# EAGLE board MCB1 (EAGLE 8.0.0)

Size 101.6 x 101.6 mm. Coordinates in mm from the lower left corner, seen from the top.
Outline: circle at 50.8,50.8 radius 50.8
Copper layers (1*16): Top 0.035mm / dielectric 1.5mm / Bottom 0.035mm
Design rules "default": minimum track width 10mil, minimum drill 24mil, track to track 8mil, track to pad 8mil, pad to pad 8mil, via to via 8mil, smd to smd 8mil, copper to edge 40mil, drill to drill 8mil, minimum pad ring 10mil, minimum via ring 8mil, stop-mask expansion 4mil, vias tented up to drill 0mil, thermal gap 10mil

## Footprints (pad centres in the part's own frame; a part is rotated, then mirrored left to right if it is on the bottom)
KK254_VERT_2PIN = drill 1.2 octagon: P$1 1.27,0; P$2 -1.27,0
SML1206 = smd 1.5 x 1.5: A 1.75,0; C -1.75,0
C0805 = smd 1.3 x 1.5: 1 -0.95,0; 2 0.95,0
SOD123 = smd 1.4 x 1.4: A 1.9,0; C -1.9,0
FUSE_5MM = drill 2.54 pad 3.556: 1 0,-10; 2 0,-4.158; 3 0,4.158; 4 0,10
SO16 = smd 0.66 x 2.032: 1 -4.445,-3.073; 2 -3.175,-3.073; 3 -1.905,-3.073; 4 -0.635,-3.073; 5 0.635,-3.073; 6 1.905,-3.073; 7 3.175,-3.073; 8 4.445,-3.073; 9 4.445,3.073; 10 3.175,3.073; 11 1.905,3.073; 12 0.635,3.073; 13 -0.635,3.073; 14 -1.905,3.073; 15 -3.175,3.073; 16 -4.445,3.073
CHIPLED_0805 = smd 1.2 x 1.2: A 0,-1.05; C 0,1.05
CHIPLED_1206 = smd 1.5 x 1.5: A 0,-1.75; C 0,1.75
R0603 = smd 1 x 1.1: 1 -0.85,0; 2 0.85,0
R0805 = smd 1.3 x 1.5: 1 -0.95,0; 2 0.95,0
TSSOP-28_4MM = smd 1 x 0.3: 1 -3.2,4.225; 2 -3.2,3.575; 3 -3.2,2.925; 4 -3.2,2.275; 5 -3.2,1.625; 6 -3.2,0.975; 7 -3.2,0.325; 8 -3.2,-0.325; 9 -3.2,-0.975; 10 -3.2,-1.625; 11 -3.2,-2.275; 12 -3.2,-2.925; 13 -3.2,-3.575; 14 -3.2,-4.225; 15 3.2,-4.225; 16 3.2,-3.575; 17 3.2,-2.925; 18 3.2,-2.275; 19 3.2,-1.625; 20 3.2,-0.975; 21 3.2,-0.325; 22 3.2,0.325; 23 3.2,0.975; 24 3.2,1.625; 25 3.2,2.275; 26 3.2,2.925; 27 3.2,3.575; 28 3.2,4.225
LTC2497-UHF = smd 0.25 x 0.7: ADCINN -0.25,2.4; ADCINP 0.25,2.4; CH0 0.75,-2.4; CH1 1.25,-2.4; CH2 1.75,-2.4; CH3 2.25,-2.4; CH4 2.75,-2.4; CH12 2.75,2.4; CH13 2.25,2.4; CH14 1.75,2.4; CH15 1.25,2.4; COM 0.25,-2.4; GND0 -2.75,-2.4; GND1 -1.25,-2.4; GND2 -0.25,-2.4; GND3 -2.75,2.4; MUXOUTN -0.75,2.4; MUXOUTP 0.75,2.4; NC -0.75,-2.4; REF+ -1.75,2.4; REF- -2.25,2.4; SCL -2.25,-2.4; SDA -1.75,-2.4; VCC -1.25,2.4 | smd 0.7 x 0.25: CA0 -3.4,-0.5; CA1 -3.4,-1; CA2 -3.4,-1.5; CH5 3.4,-1.5; CH6 3.4,-1; CH7 3.4,-0.5; CH8 3.4,0; CH9 3.4,0.5; CH10 3.4,1; CH11 3.4,1.5; F0 -3.4,0; GND4 -3.4,0.5; GND5 -3.4,1; GND6 -3.4,1.5
ACS713-SOIC = smd 0.65 x 1.75: P$1 -1.905,-2.8; P$2 -0.635,-2.8; P$3 0.635,-2.8; P$4 1.905,-2.8; P$5 1.905,2.8; P$6 0.635,2.8; P$7 -0.635,2.8; P$8 -1.905,2.8
SUPERSABRE_3CIRCUIT = drill 5.15: P$1 0,0; P$3 -7.49,0 | drill 5.15 square: P$2 7.49,0 | hole 3: 12.29,-1.805; -12.29,-2.345
ULTRAFIT_2PIN = drill 1.02: P$1 -1.75,0 | drill 1.02 square: P$2 1.75,0 | hole 2.3: 4.25,-0.625; -4.25,-0.625
PW_R-PDSO-G24 = smd 0.4 x 1.2: 1 -3.575,-2.9; 2 -2.925,-2.9; 3 -2.275,-2.9; 4 -1.625,-2.9; 5 -0.975,-2.9; 6 -0.325,-2.9; 7 0.325,-2.9; 8 0.975,-2.9; 9 1.625,-2.9; 10 2.275,-2.9; 11 2.925,-2.9; 12 3.575,-2.9; 13 3.575,2.9; 14 2.925,2.9; 15 2.275,2.9; 16 1.625,2.9; 17 0.975,2.9; 18 0.325,2.9; 19 -0.325,2.9; 20 -0.975,2.9; 21 -1.625,2.9; 22 -2.275,2.9; 23 -2.925,2.9; 24 -3.575,2.9
SO8 = smd 0.6 x 2.2: 1 -1.905,-2.6; 2 -0.635,-2.6; 3 0.635,-2.6; 4 1.905,-2.6; 5 1.905,2.6; 6 0.635,2.6; 7 -0.635,2.6; 8 -1.905,2.6
MS5837-30BA = smd 1.3 x 1.3: 1 -1,1; 2 -1,-1; 3 1,-1; 4 1,1
X-SERIES = drill 1.778 square: P1 10.363,1.994; P2 10.363,-1.994
87438-04 = smd 7 x 0.85: 1 0,2.25; 2 0,0.75; 3 0,-0.75; 4 0,-2.25

## Placement (x,y rotation side)
2PIN_1  [KK254_VERT_2PIN]  -50.8,27.94 0 top  (outside the outline)
2PIN_2  [KK254_VERT_2PIN]  -57.15,-31.75 0 top  (outside the outline)
2PIN_3  [KK254_VERT_2PIN]  -68.58,27.94 0 top  (outside the outline)
2PIN_4  [KK254_VERT_2PIN]  19.05,40.64 0 top
2PIN_6  [KK254_VERT_2PIN]  -26.67,52.07 0 top  (outside the outline)
2PIN_7  [KK254_VERT_2PIN]  -35.56,52.07 0 top  (outside the outline)
2PIN_8  [KK254_VERT_2PIN]  19.05,49.53 0 top
2PIN_9  [KK254_VERT_2PIN]  -53.34,52.07 0 top  (outside the outline)
2PIN_10  [KK254_VERT_2PIN]  -33.02,27.94 0 top  (outside the outline)
2PIN_11  [KK254_VERT_2PIN]  -41.91,27.94 0 top  (outside the outline)
5V_PWR  [SML1206]  67.31,-30.48 0 top  (outside the outline)
C1  47nF  [C0805]  -47.75,-39.37 180 top  (outside the outline)
C2  0.1uF  [C0805]  -43.18,-39.37 0 top  (outside the outline)
C3  0.1uF  [C0805]  -58.42,64.77 0 top  (outside the outline)
C4  47nF  [C0805]  -49.53,69.85 0 top  (outside the outline)
C5  0.1uF  [C0805]  -64.77,60.96 0 top  (outside the outline)
C6  47nF  [C0805]  -55.88,69.85 0 top  (outside the outline)
C7  0.1uF  [C0805]  -71.12,60.96 0 top  (outside the outline)
C8  47nF  [C0805]  -63.5,68.58 0 top  (outside the outline)
C11  47nF  [C0805]  -68.58,69.85 0 top  (outside the outline)
C12  0.1uF  [C0805]  -17.78,69.85 0 top  (outside the outline)
C13  0.1uF  [C0805]  -24.13,69.85 0 top  (outside the outline)
C14  47nF  [C0805]  -74.93,69.85 0 top  (outside the outline)
C15  0.1uF  [C0805]  -30.48,69.85 0 top  (outside the outline)
C16  47nF  [C0805]  -16.51,76.2 0 top  (outside the outline)
C17  0.1uF  [C0805]  -36.83,69.85 0 top  (outside the outline)
C18  47nF  [C0805]  -22.86,76.2 0 top  (outside the outline)
D1  [SOD123]  77.47,-30.48 0 top  (outside the outline)
D2  [SOD123]  86.36,-30.48 0 top  (outside the outline)
D3  [SOD123]  95.25,-30.48 0 top  (outside the outline)
D4  [SOD123]  104.14,-30.48 0 top  (outside the outline)
D5  [SOD123]  113.03,-30.48 0 top  (outside the outline)
D6  [SOD123]  121.92,-30.48 0 top  (outside the outline)
D7  [SOD123]  8.89,-35.56 0 top  (outside the outline)
D8  [SOD123]  17.78,-35.56 0 top  (outside the outline)
D9  [SOD123]  26.67,-35.56 0 top  (outside the outline)
D10  [SOD123]  35.56,-35.56 0 top  (outside the outline)
D11  [SOD123]  44.45,-35.56 0 top  (outside the outline)
D12  [SOD123]  53.34,-35.56 0 top  (outside the outline)
F1  FUSEX20MM  [FUSE_5MM]  -83.82,-26.67 0 top  (outside the outline)
F2  FUSEX20MM  [FUSE_5MM]  -50.8,-24.64 90 top  (outside the outline)
F3  FUSEX20MM  [FUSE_5MM]  -31.75,12.7 0 top  (outside the outline)
F4  FUSEX20MM  [FUSE_5MM]  -39.37,12.7 0 top  (outside the outline)
F5  FUSEX20MM  [FUSE_5MM]  -46.99,12.7 0 top  (outside the outline)
F6  FUSEX20MM  [FUSE_5MM]  -54.61,12.7 0 top  (outside the outline)
F7  FUSEX20MM  [FUSE_5MM]  -62.23,12.7 0 top  (outside the outline)
F8  FUSEX20MM  [FUSE_5MM]  -69.85,12.7 0 top  (outside the outline)
F9  FUSEX20MM  [FUSE_5MM]  50.8,96.52 270 top
IC1  ULN2001AD  [SO16]  127,11.43 0 top  (outside the outline)
IC2  ULN2001AD  [SO16]  -12.7,-53.34 0 top  (outside the outline)
LED1  [CHIPLED_0805]  -67.31,74.93 0 top  (outside the outline)
LED2  [CHIPLED_0805]  -72.39,74.93 0 top  (outside the outline)
LED3  [CHIPLED_0805]  -13.97,81.28 0 top  (outside the outline)
LED4  [CHIPLED_0805]  -19.05,81.28 0 top  (outside the outline)
LED5  [CHIPLED_0805]  -24.13,81.28 0 top  (outside the outline)
LED6  [CHIPLED_0805]  -29.21,81.28 0 top  (outside the outline)
LED7  [CHIPLED_0805]  -34.29,81.28 0 top  (outside the outline)
LED8  [CHIPLED_0805]  -39.37,81.28 0 top  (outside the outline)
LED9  [CHIPLED_1206]  124.46,-16.51 0 top  (outside the outline)
LED10  [CHIPLED_1206]  54.61,-17.78 0 top  (outside the outline)
LED11  [CHIPLED_1206]  60.96,-17.78 0 top  (outside the outline)
LED12  [CHIPLED_1206]  67.31,-17.78 0 top  (outside the outline)
LED13  [CHIPLED_1206]  73.66,-17.78 0 top  (outside the outline)
LED14  [CHIPLED_1206]  80.01,-17.78 0 top  (outside the outline)
LED15  [CHIPLED_1206]  86.36,-17.78 0 top  (outside the outline)
LED16  [CHIPLED_1206]  92.71,-17.78 0 top  (outside the outline)
LED17  [CHIPLED_1206]  99.06,-17.78 0 top  (outside the outline)
LED18  [CHIPLED_1206]  105.41,-17.78 0 top  (outside the outline)
LED19  [CHIPLED_1206]  111.76,-17.78 0 top  (outside the outline)
LED20  [CHIPLED_1206]  118.11,-17.78 0 top  (outside the outline)
R1  [R0603]  57.15,-30.48 0 top  (outside the outline)
R2  [R0603]  60.96,-30.48 0 top  (outside the outline)
R3  100  [R0805]  -33.02,76.2 0 top  (outside the outline)
R4  100  [R0805]  -38.1,76.2 0 top  (outside the outline)
R5  100  [R0805]  -43.18,76.2 0 top  (outside the outline)
R6  100  [R0805]  -48.26,76.2 0 top  (outside the outline)
R7  100  [R0805]  -53.34,76.2 0 top  (outside the outline)
R8  100  [R0805]  -58.42,76.2 0 top  (outside the outline)
R9  100  [R0805]  -63.5,76.2 0 top  (outside the outline)
R10  100  [R0805]  -27.94,76.2 0 top  (outside the outline)
R11  [R0603]  6.35,-30.48 0 top  (outside the outline)
R12  [R0603]  11.43,-30.48 0 top  (outside the outline)
R13  [R0603]  16.51,-30.48 0 top  (outside the outline)
R14  [R0603]  21.59,-30.48 0 top  (outside the outline)
R15  [R0603]  26.67,-30.48 0 top  (outside the outline)
R16  [R0603]  31.75,-30.48 0 top  (outside the outline)
R17  [R0603]  36.83,-30.48 0 top  (outside the outline)
R18  [R0603]  41.91,-30.48 0 top  (outside the outline)
R19  1k  [R0603]  129.54,-16.51 0 top  (outside the outline)
R20  [R0603]  46.99,-30.48 0 top  (outside the outline)
R21  [R0603]  52.07,-30.48 0 top  (outside the outline)
R23  0  [R0805]  6.35,-43.18 0 top  (outside the outline)
U1  PCA9685  [TSSOP-28_4MM]  -24.13,30.48 0 top  (outside the outline)
U$1  LTC2497UHF  [LTC2497-UHF]  -43.18,60.96 0 top  (outside the outline)
U$2  ACS713SOIC  [ACS713-SOIC]  -55.63,-37.85 270 top  (outside the outline)
U$3  SUPERSABRE_3CIRCUIT  [SUPERSABRE_3CIRCUIT]  -78.74,104.14 0 top  (outside the outline)
U$4  SUPERSABRE_3CIRCUIT  [SUPERSABRE_3CIRCUIT]  -84.72,-5.45 0 top  (outside the outline)
U$5  ULTRAFIT_2PIN  [ULTRAFIT_2PIN]  -45.72,-31.75 180 top  (outside the outline)
U$6  ULTRAFIT_2PIN  [ULTRAFIT_2PIN]  -27.94,86.36 0 top  (outside the outline)
U$7  ULTRAFIT_2PIN  [ULTRAFIT_2PIN]  -38.1,86.36 0 top  (outside the outline)
U$8  ACS713SOIC  [ACS713-SOIC]  -66.04,53.34 0 top  (outside the outline)
U$9  PCF8575C  [PW_R-PDSO-G24]  44.45,-19.05 0 top  (outside the outline)
U$10  P82B715  [SO8]  33.02,-19.05 0 top  (outside the outline)
U$11  ACS713SOIC  [ACS713-SOIC]  -71.12,53.34 0 top  (outside the outline)
U$12  ULTRAFIT_2PIN  [ULTRAFIT_2PIN]  -48.26,86.36 0 top  (outside the outline)
U$13  ACS713SOIC  [ACS713-SOIC]  99.06,38.1 0 top
U$14  ULTRAFIT_2PIN  [ULTRAFIT_2PIN]  -58.42,86.36 0 top  (outside the outline)
U$15  ACS713SOIC  [ACS713-SOIC]  5.08,49.53 0 top
U$16  ULTRAFIT_2PIN  [ULTRAFIT_2PIN]  -68.58,86.36 0 top  (outside the outline)
U$17  ACS713SOIC  [ACS713-SOIC]  8.89,11.43 0 top
U$18  ULTRAFIT_2PIN  [ULTRAFIT_2PIN]  24.13,87.63 0 top
U$19  ACS713SOIC  [ACS713-SOIC]  -15.24,62.23 0 top  (outside the outline)
U$20  ULTRAFIT_2PIN  [ULTRAFIT_2PIN]  -33.02,100.33 0 top  (outside the outline)
U$21  ACS713SOIC  [ACS713-SOIC]  -35.56,62.23 0 top  (outside the outline)
U$22  MS5837-30BA  [MS5837-30BA]  60.96,-34.29 0 top  (outside the outline)
VALVE01  X-5-XX-L-F  [X-SERIES]  30.99,39.88 270 bottom
VALVE02  X-5-XX-L-F  [X-SERIES]  38.86,39.88 270 bottom
VALVE03  X-5-XX-L-F  [X-SERIES]  46.74,39.88 270 bottom
VALVE04  X-5-XX-L-F  [X-SERIES]  54.61,39.88 270 bottom
VALVE05  X-5-XX-L-F  [X-SERIES]  62.48,39.88 270 bottom
VALVE06  X-5-XX-L-F  [X-SERIES]  70.36,39.88 270 bottom
VALVE07  X-5-XX-L-F  [X-SERIES]  70.36,64.01 90 bottom
VALVE08  X-5-XX-L-F  [X-SERIES]  62.48,64.01 90 bottom
VALVE09  X-5-XX-L-F  [X-SERIES]  54.61,64.01 90 bottom
VALVE10  X-5-XX-L-F  [X-SERIES]  46.74,64.01 90 bottom
VALVE11  X-5-XX-L-F  [X-SERIES]  38.86,64.01 90 bottom
VALVE12  X-5-XX-L-F  [X-SERIES]  30.99,64.01 90 bottom
X2  87438-04  [87438-04]  22.86,-19.05 0 top  (outside the outline)

## Library data of the parts
2PIN_1-2PIN_4 2PIN_6-2PIN_11 F1-F9 U$3-U$7 U$12 U$14 U$16 U$18 U$20 = molex
5V_PWR LED1-LED20 = led
C1-C8 C11-C18 R1-R21 R23 = resistor
D1-D12 = diode
IC1 IC2 = uln-udn
U1 = SparkFun-DigitalIC; PROD_ID: IC-12240
U$1 = linear
U$2 U$8 U$11 U$13 U$15 U$17 U$19 U$21 = allegro
U$9 = texas
U$10 = nxp
U$22 = te_connectivity
VALVE01-VALVE09 VALVE10-VALVE12 = ParkerFludics
X2 = con-molex_MOD; OC_FARNELL: unknown; OC_NEWARK: unknown

## Nets
5V: 2PIN_10.P$1 5V_PWR.A C2.1 C3.1 C5.1 C7.1 C12.1 C13.1 C15.1 C17.1 D1.C D2.C D3.C D4.C D5.C D6.C D7.C D8.C D9.C D10.C D11.C D12.C IC1.9 IC2.9 LED9.A LED10.A LED11.A LED12.A LED13.A LED14.A LED15.A LED16.A LED17.A LED18.A LED19.A LED20.A U1.1 U1.3 U1.5 U1.28 U$1.REF+ U$1.VCC U$2.P$8 U$8.P$8 U$9.2 U$9.3 U$9.21 U$9.24 U$10.8 U$11.P$8 U$13.P$8 U$15.P$8 U$17.P$8 U$19.P$8 U$21.P$8 U$22.2 VALVE01.P1 VALVE02.P1 VALVE03.P1 VALVE04.P1 VALVE05.P1 VALVE06.P1 VALVE07.P1 VALVE08.P1 VALVE09.P1 VALVE10.P1 VALVE11.P1 VALVE12.P1 X2.1
5V_LED: 5V_PWR.C R19.2
5VGND: 2PIN_2.P$2 2PIN_3.P$2 2PIN_4.P$2 2PIN_6.P$2 2PIN_7.P$2 2PIN_8.P$2 2PIN_9.P$2 2PIN_10.P$2 2PIN_11.P$2 C1.2 C2.2 C3.2 C4.2 C5.2 C6.2 C7.2 C8.2 C11.2 C12.2 C13.2 C14.2 C15.2 C16.2 C17.2 C18.2 LED1.C LED2.C LED3.C LED4.C LED5.C LED6.C LED7.C LED8.C R23.2 U1.2 U1.4 U1.14 U1.23 U1.24 U1.25 U$1.COM U$1.F0 U$1.GND0 U$1.GND1 U$1.GND2 U$1.GND3 U$1.GND4 U$1.GND5 U$1.GND6 U$1.REF- U$2.P$5 U$8.P$5 U$11.P$5 U$13.P$5 U$15.P$5 U$17.P$5 U$19.P$5 U$21.P$5
AN0: U$1.CH0 U$2.P$7
AN1: U$1.CH1 U$13.P$7
AN2: U$1.CH2 U$15.P$7
AN3: U$1.CH3 U$8.P$7
AN4: U$1.CH4 U$11.P$7
AN5: U$1.CH5 U$17.P$7
AN6: U$1.CH6 U$19.P$7
AN7: U$1.CH7 U$21.P$7
BATGND: U$3.P$1 U$3.P$2 U$3.P$3 U$5.P$1 U$6.P$1 U$7.P$1 U$12.P$1 U$14.P$1 U$16.P$1 U$18.P$1 U$20.P$1
GND: IC1.8 IC2.8 R19.1 R23.1 U$9.12 U$10.4 U$22.1 X2.4
INT: U$9.1
N$1: C1.1 U$2.P$6
N$2: U$2.P$3 U$2.P$4 U$5.P$2
N$3: U$1.ADCINP U$1.MUXOUTP
N$4: U$1.ADCINN U$1.MUXOUTN
N$5: U$14.P$2 U$15.P$3 U$15.P$4
N$6: U$6.P$2 U$13.P$3 U$13.P$4
N$7: C6.1 U$15.P$6
N$8: U$7.P$2 U$8.P$3 U$8.P$4
N$9: C8.1 U$8.P$6
N$10: C4.1 U$13.P$6
N$11: F1.3 U$4.P$1 U$4.P$2 U$4.P$3
N$12: F2.3 U$2.P$1 U$2.P$2
N$13: C11.1 U$11.P$6
N$14: U$11.P$3 U$11.P$4 U$12.P$2
N$15: U$16.P$2 U$17.P$3 U$17.P$4
N$16: C14.1 U$17.P$6
N$17: U$18.P$2 U$19.P$3 U$19.P$4
N$18: C16.1 U$19.P$6
N$19: U$20.P$2 U$21.P$3 U$21.P$4
N$20: C18.1 U$21.P$6
N$21: F3.3 U$13.P$1 U$13.P$2
N$22: F4.3
N$23: R4.1 U1.21
N$24: R10.1 U1.15
N$25: F5.3
N$26: F6.3 U$11.P$1 U$11.P$2
N$27: R7.1 U1.18
N$28: R9.1 U1.16
N$29: R8.1 U1.17
N$30: R6.1 U1.19
N$31: R5.1 U1.20
N$32: R3.1 U1.22
N$33: F7.3 U$17.P$1 U$17.P$2
N$34: F8.3 U$19.P$1 U$19.P$2
N$35: F9.3 U$21.P$1 U$21.P$2
N$36: LED1.A R3.2
N$37: LED2.A R4.2
N$38: LED3.A R5.2
N$39: LED4.A R6.2
N$40: LED5.A R7.2
N$41: LED6.A R8.2
N$42: LED7.A R9.2
N$43: LED8.A R10.2
N$44: LED9.C R1.2
N$45: LED10.C R2.2
N$46: LED11.C R11.2
N$47: LED12.C R12.2
N$48: LED13.C R13.2
N$49: LED14.C R14.2
N$50: LED15.C R15.2
N$51: LED16.C R16.2
N$52: LED17.C R17.2
N$53: LED18.C R18.2
N$54: LED19.C R20.2
N$55: LED20.C R21.2
P00: U$9.4
P01: IC1.6 U$9.5
P01_BUF: D1.A IC1.11 R1.1 VALVE01.P2
P02: IC1.5 U$9.6
P02_BUF: D2.A IC1.12 R2.1 VALVE02.P2
P03: IC1.4 U$9.7
P03_BUF: D3.A IC1.13 R11.1 VALVE03.P2
P04: IC1.3 U$9.8
P04_BUF: D4.A IC1.14 R12.1 VALVE04.P2
P05: IC1.2 U$9.9
P05_BUF: D5.A IC1.15 R13.1 VALVE05.P2
P06: IC1.1 U$9.10
P06_BUF: D6.A IC1.16 R14.1 VALVE06.P2
P07: U$9.11
P10: U$9.13
P11: IC2.6 U$9.14
P11_BUF: D7.A IC2.11 R15.1 VALVE07.P2
P12: IC2.5 U$9.15
P12_BUF: D8.A IC2.12 R16.1 VALVE08.P2
P13: IC2.4 U$9.16
P13_BUF: D9.A IC2.13 R17.1 VALVE09.P2
P14: IC2.3 U$9.17
P14_BUF: D10.A IC2.14 R18.1 VALVE10.P2
P15: IC2.2 U$9.18
P15_BUF: D11.A IC2.15 R20.1 VALVE11.P2
P16: IC2.1 U$9.19
P16_BUF: D12.A IC2.16 R21.1 VALVE12.P2
P17: U$9.20
PWM0: 2PIN_2.P$1 U1.6
PWM1: 2PIN_3.P$1 U1.7
PWM2: 2PIN_11.P$1 U1.8
PWM3: 2PIN_4.P$1 U1.9
PWM4: 2PIN_6.P$1 U1.10
PWM5: 2PIN_7.P$1 U1.11
PWM6: 2PIN_8.P$1 U1.12
PWM7: 2PIN_9.P$1 U1.13
SCL: 2PIN_1.P$2 U1.26 U$1.SCL U$9.22 U$10.3 U$22.3
SCL_BUF: U$10.2 X2.2
SDA: 2PIN_1.P$1 U1.27 U$1.SDA U$9.23 U$10.6 U$22.4
SDA_BUF: U$10.7 X2.3
VBAT: F1.1 F2.1 F3.1 F4.1 F5.1 F6.1 F7.1 F8.1 F9.1

## Tracks (layer width: path | path; a pad name or v marks a point on that pad's centre or on a via)
5V  (68 unrouted)
5V_LED  (1 unrouted)
5VGND  (57 unrouted)
AN0  (1 unrouted)
AN1  (1 unrouted)
AN2  (1 unrouted)
AN3  (1 unrouted)
AN4  (1 unrouted)
AN5  (1 unrouted)
AN6  (1 unrouted)
AN7  (1 unrouted)
BATGND  (10 unrouted)
GND  (7 unrouted)
N$1  (1 unrouted)
N$2  (2 unrouted)
N$3  (1 unrouted)
N$4  (1 unrouted)
N$5  (2 unrouted)
N$6  (2 unrouted)
N$7  (1 unrouted)
N$8  (2 unrouted)
N$9  (1 unrouted)
N$10  (1 unrouted)
N$11  (3 unrouted)
N$12  (2 unrouted)
N$13  (1 unrouted)
N$14  (2 unrouted)
N$15  (2 unrouted)
N$16  (1 unrouted)
N$17  (2 unrouted)
N$18  (1 unrouted)
N$19  (2 unrouted)
N$20  (1 unrouted)
N$21  (2 unrouted)
N$23  (1 unrouted)
N$24  (1 unrouted)
N$26  (2 unrouted)
N$27  (1 unrouted)
N$28  (1 unrouted)
N$29  (1 unrouted)
N$30  (1 unrouted)
N$31  (1 unrouted)
N$32  (1 unrouted)
N$33  (2 unrouted)
N$34  (2 unrouted)
N$35  (2 unrouted)
N$36  (1 unrouted)
N$37  (1 unrouted)
N$38  (1 unrouted)
N$39  (1 unrouted)
N$40  (1 unrouted)
N$41  (1 unrouted)
N$42  (1 unrouted)
N$43  (1 unrouted)
N$44  (1 unrouted)
N$45  (1 unrouted)
N$46  (1 unrouted)
N$47  (1 unrouted)
N$48  (1 unrouted)
N$49  (1 unrouted)
N$50  (1 unrouted)
N$51  (1 unrouted)
N$52  (1 unrouted)
N$53  (1 unrouted)
N$54  (1 unrouted)
N$55  (1 unrouted)
P01  (1 unrouted)
P01_BUF  (3 unrouted)
P02  (1 unrouted)
P02_BUF  (3 unrouted)
P03  (1 unrouted)
P03_BUF  (3 unrouted)
P04  (1 unrouted)
P04_BUF  (3 unrouted)
P05  (1 unrouted)
P05_BUF  (3 unrouted)
P06  (1 unrouted)
P06_BUF  (3 unrouted)
P11  (1 unrouted)
P11_BUF  (3 unrouted)
P12  (1 unrouted)
P12_BUF  (3 unrouted)
P13  (1 unrouted)
P13_BUF  (3 unrouted)
P14  (1 unrouted)
P14_BUF  (3 unrouted)
P15  (1 unrouted)
P15_BUF  (3 unrouted)
P16  (1 unrouted)
P16_BUF  (3 unrouted)
PWM0  (1 unrouted)
PWM1  (1 unrouted)
PWM2  (1 unrouted)
PWM3  (1 unrouted)
PWM4  (1 unrouted)
PWM5  (1 unrouted)
PWM6  (1 unrouted)
PWM7  (1 unrouted)
SCL  (5 unrouted)
SCL_BUF  (1 unrouted)
SDA  (5 unrouted)
SDA_BUF  (1 unrouted)
VBAT  (8 unrouted)